# Altium PCB MaiChe.PcbDoc
Units mm, origin at the board's own origin, x right, y up, seen from the top; angles counter-clockwise.
Board outline 152.4 x 101.6 mm, 2 copper layers (Top Layer, Bottom Layer); 32 components, 34 nets, 120 pads, 0 vias.
Unrouted connection lines stored in the file: 17.
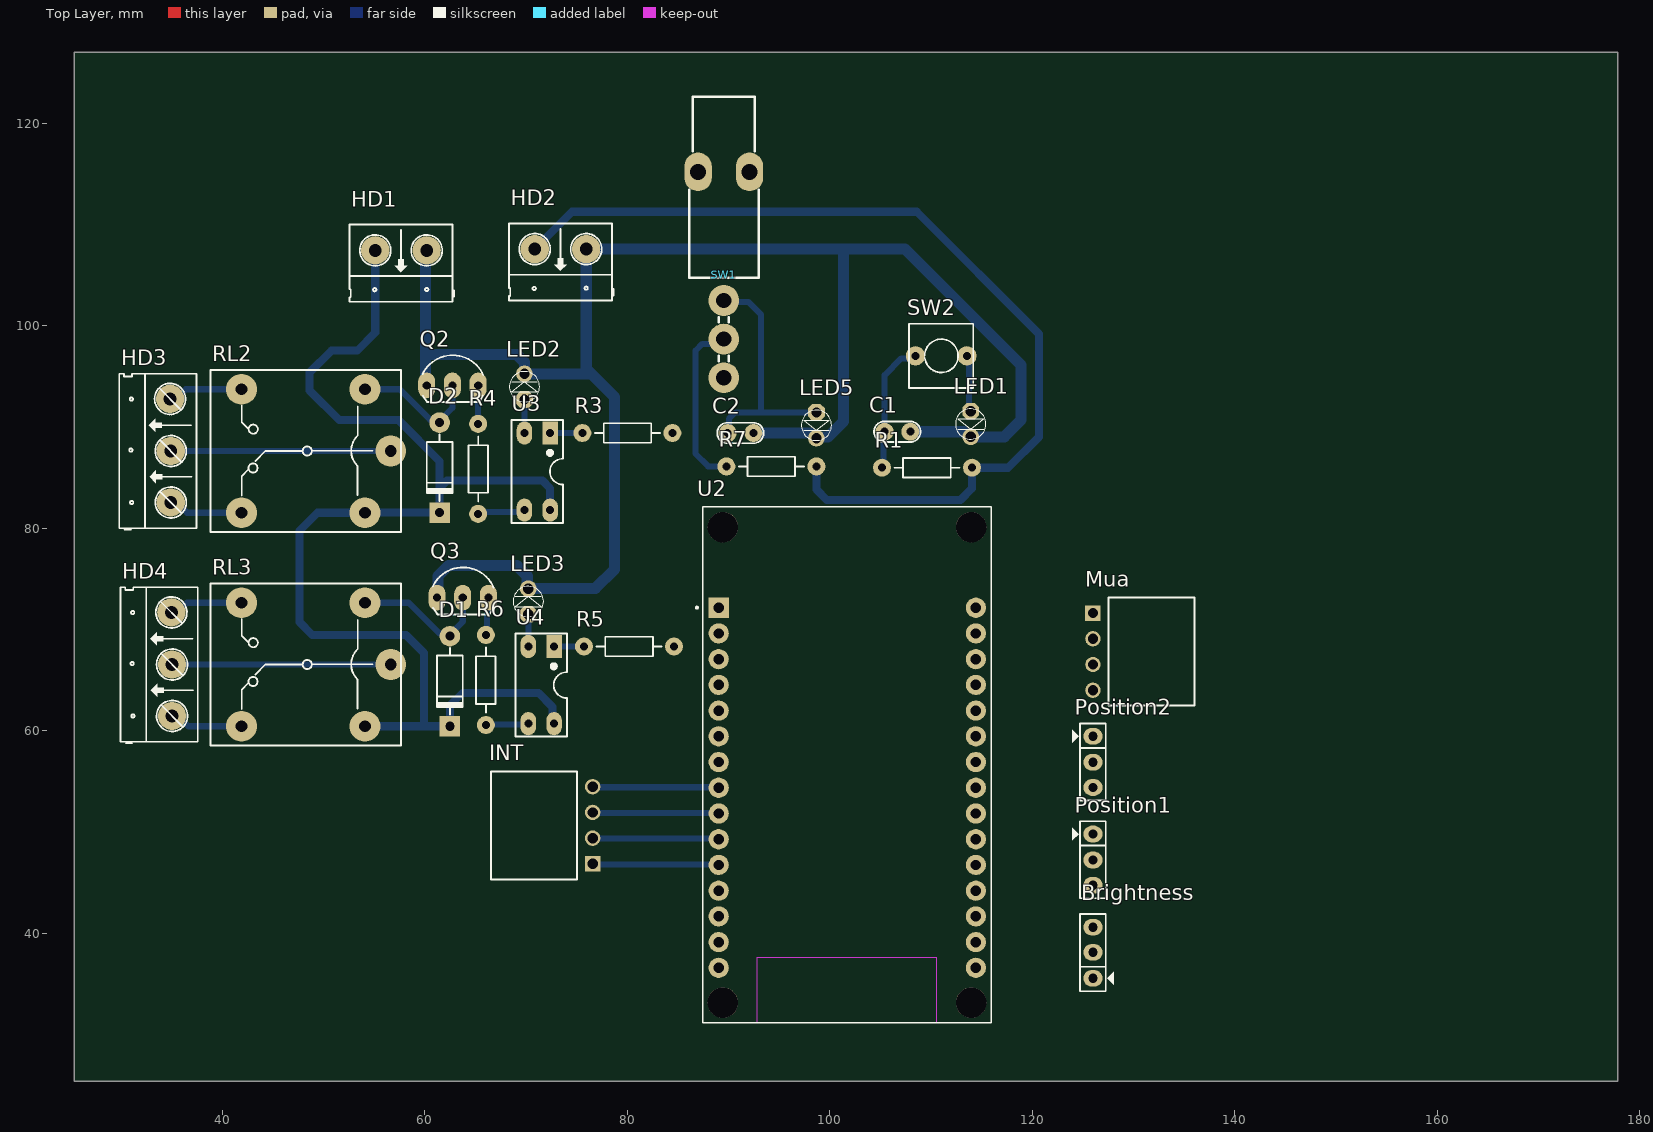
[diagram p0: Top Layer view]
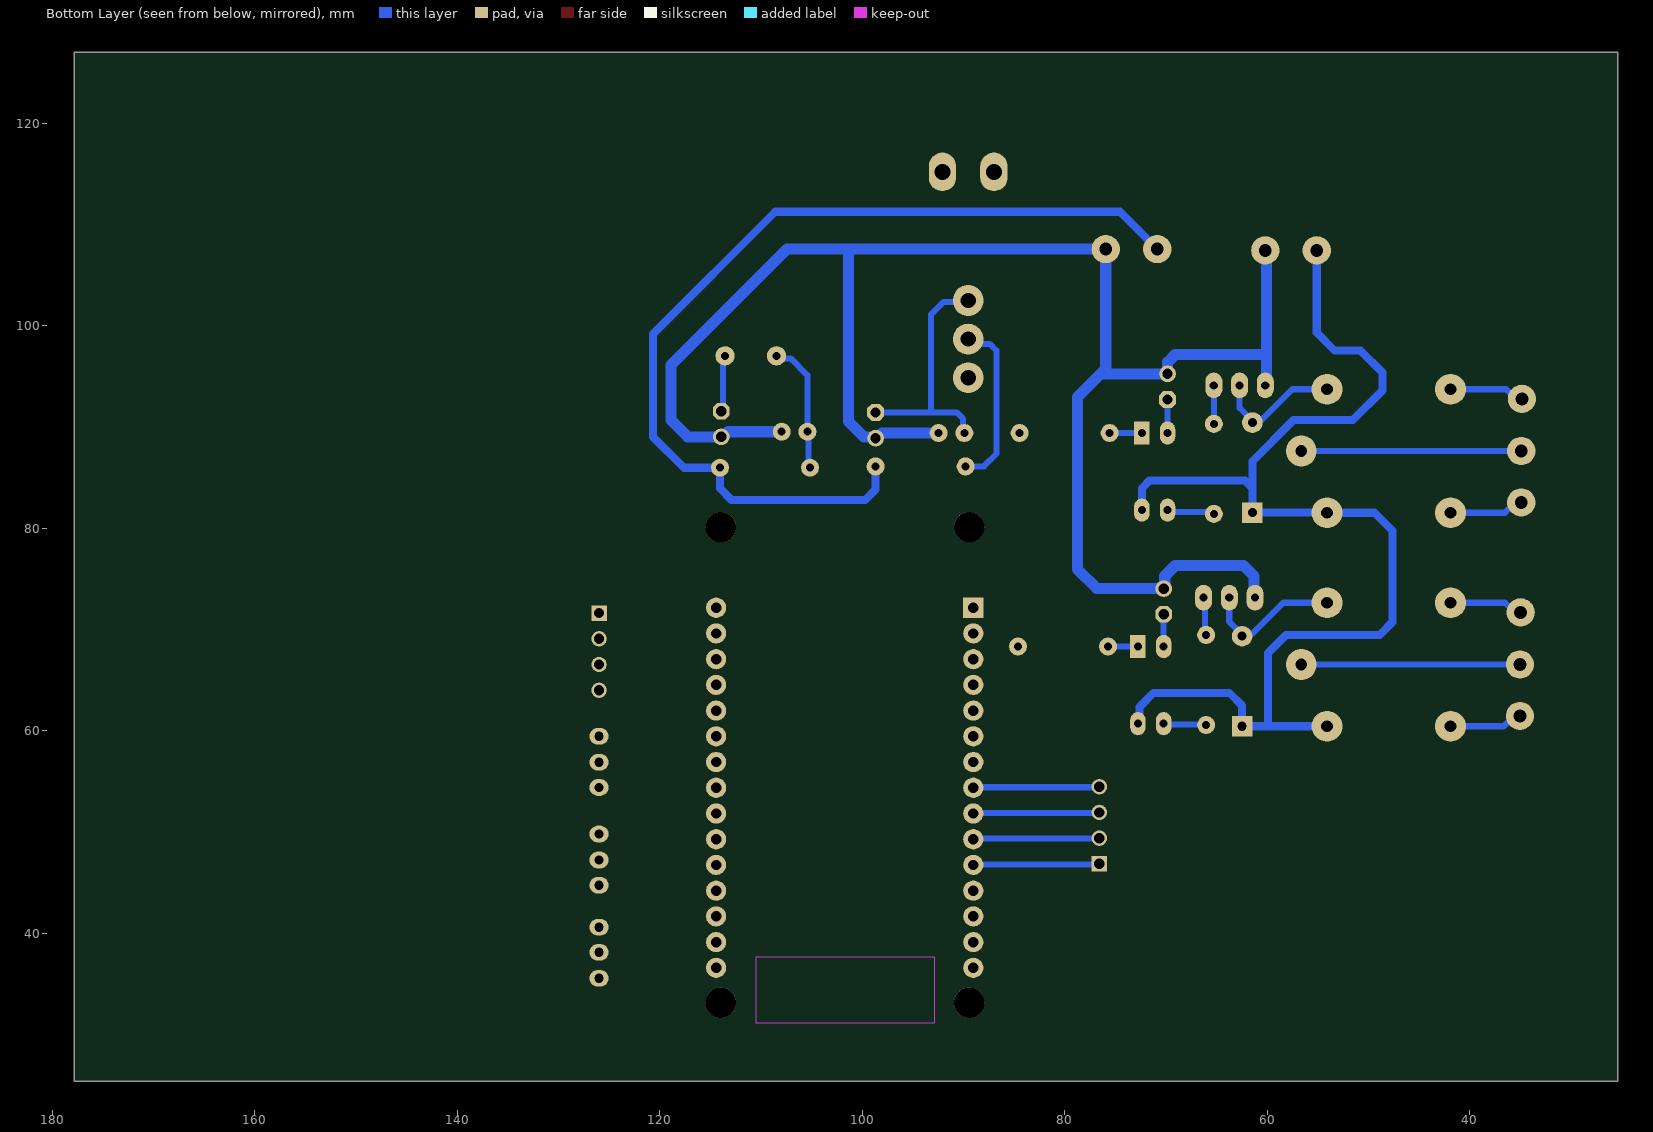
[diagram p1: Bottom Layer view, seen from below]
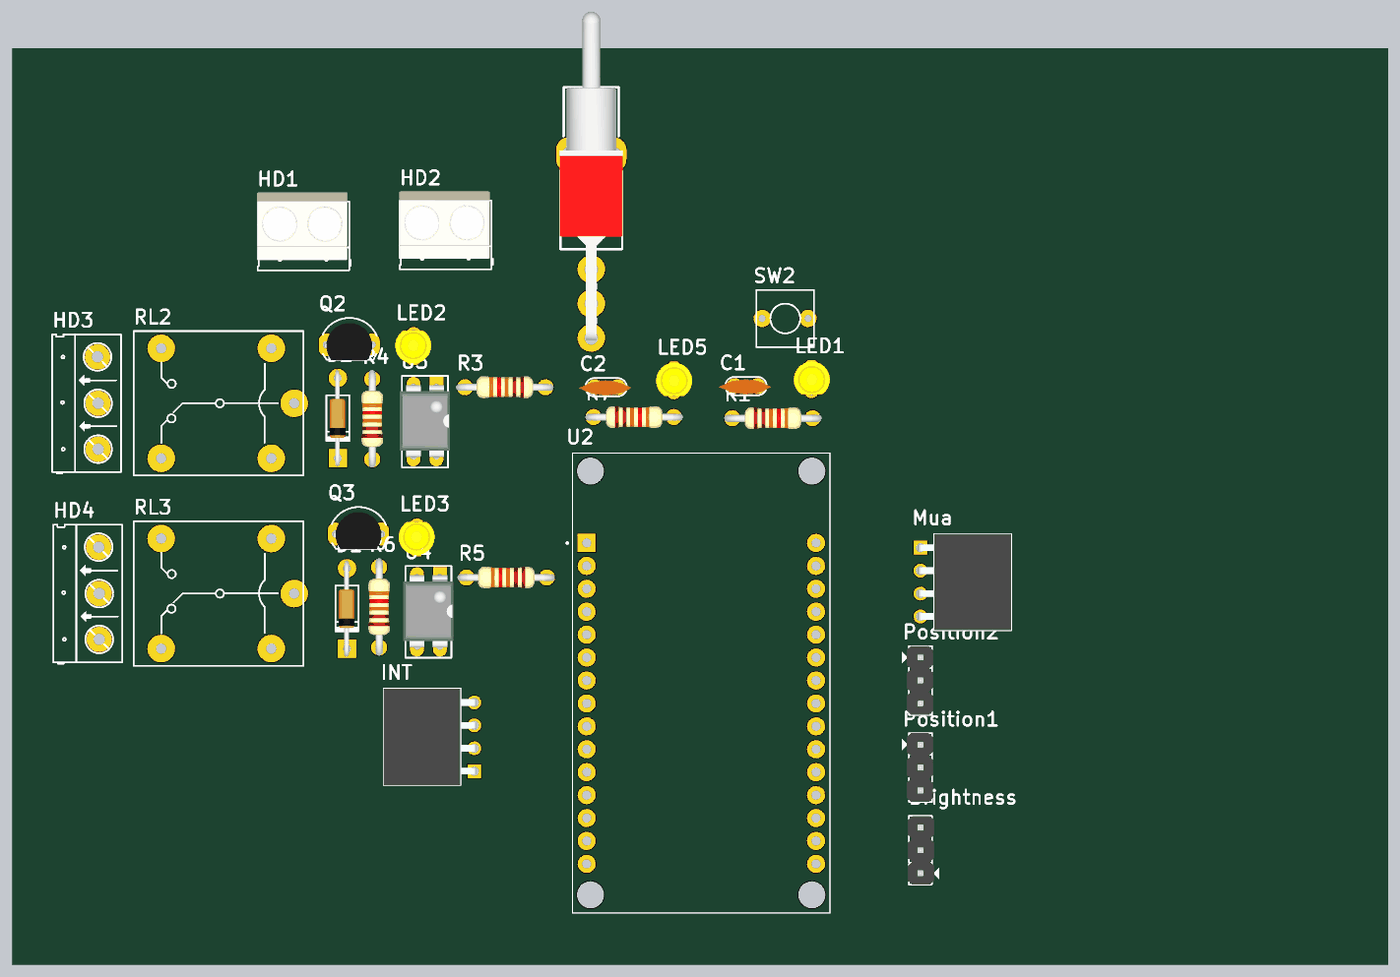
[diagram p2: 3D render of the assembled board from above, using the file's embedded part models]

## Layer stack, top to bottom
Top Solder: solder mask 0.0102, Solder Resist, Dk 3.5
Top Layer: signal copper 0.0356
Dielectric 1: dielectric 0.32, FR-4, Dk 4.8
Bottom Layer: signal copper 0.0356
Bottom Solder: solder mask 0.0102, Solder Resist, Dk 3.5

## Board outline
25.4,25.4 177.8,25.4 177.8,127 25.4,127

## Design rules (kind name [scope] priority, off if disabled: settings)
Clearance [All] p1: gap=0.254 ignorepadtopadclearanceinfootprint=FALSE except(0: Arc-Hole Track-Hole SMDPad-Hole THPad-Hole Via-Hole Fill-Hole Poly-Hole Region-Hole Text-Hole)
PolygonConnect [All] p1: connectstyle=Relief reliefconductorwidth=0.254 reliefentries=4 polygonreliefangle="90 Angle" airgapwidth=0.254
RoutingVias [All] p1: holewidth=0.711 width=1.27 viastyle="Through Hole" minholewidth=0.711 minwidth=1.27 maxholewidth=0.711 maxwidth=1.27
SolderMaskExpansion [All] p1: expansion=0.102 istentingtop=FALSE
Width VCC_3_3 [InNet('3.3V')] p1: maxlimit=0.9 minlimit=0.7 preferedwidth=0.8
Width VCC_12 [InNet('+12')] p2: maxlimit=0.9 minlimit=0.7 preferedwidth=0.8
Width VCC_5 [InNet('+5')] p3: maxlimit=0.9 minlimit=0.7 preferedwidth=0.8
Width GND [InNet('GND')] p4: maxlimit=1.2 minlimit=1 preferedwidth=1.1
Width [All] p5: maxlimit=0.7 minlimit=0.5 preferedwidth=0.6
30 further rules are at their usual default settings.

## Components (designator, comment, footprint, x,y, rotation, side; value= is the part's Value field where it differs from the comment)
Brightness "Jumper 3" JP3 125.984,38.1 r90 top value=J3
C1 "100pF" CN1 107.95,89.535 r180 top
C2 "100pF" CN1 92.456,89.408 r180 top
D1 "1N4007" D1A 62.484,69.342 r90 top
D2 "1N4007" D1A 61.468,90.437 r90 top
HD1 "Header 2" HED2 60.198,107.442 r180 top
HD2 "Header 2" HED2 75.946,107.569 r180 top
HD3 "Header 3" HED3 34.925,82.55 r90 top
HD4 "Header 3" HED3 35.052,61.468 r90 top
INT "JP 1x4 2.54" "JP 1x4 CC" 76.581,50.673 r90 top
LED1 "LED" LED-3MM-YELLOW 113.919,91.567 r270 top value="LED 3 ly Single Colour"
LED2 "LED" LED-3MM-YELLOW 69.85,92.71 r90 top value="LED 3 ly Single Colour"
LED3 "LED" LED-3MM-YELLOW 70.231,71.501 r90 top value="LED 3 ly Single Colour"
LED5 "LED" LED-3MM-YELLOW 98.679,91.44 r270 top value="LED 3 ly Single Colour"
Mua "JP 1x4 2.54" "JP 1x4 CC" 125.984,67.818 r270 top
Position1 "Jumper 3" JP3 125.984,47.269 r270 top value=J3
Position2 "Jumper 3" JP3 125.984,56.921 r270 top value=J3
Q2 "C1815" QTO-92 62.738,94.107 r0 top
Q3 "C1815" QTO-92 63.754,73.152 r0 top
R1 "10K" R1/4W 114.046,85.979 r180 top value="R1/4W - 1K"
R3 "1k" R1/4W 75.565,89.408 r0 top value="R1/4W - 1K"
R4 "510" R1/4W 65.278,90.31 r270 top value="R1/4W - 1K"
R5 "1k" R1/4W 75.724,68.326 r0 top value="R1/4W - 1K"
R6 "510" R1/4W 66.04,69.469 r270 top value="R1/4W - 1K"
R7 "10K" R1/4W 98.679,86.106 r180 top value="R1/4W - 1K"
RL2 "Relay 10A/12V" RL_SPDT_10A 56.642,87.63 r180 top value="Relay SPDT, 10A, 12V"
RL3 "Relay 10A/12V" RL_SPDT_10A 56.642,66.548 r180 top value="Relay SPDT, 10A, 12V"
SW1 "Switch 3x1" SW3x1 89.535,122.631 r180 top value="Switch 4x2"
SW2 "SW" SW2 113.538,97.028 r180 top value="SW chip 2 pin"
U2 "ESP32-DEVKIT-V1" MODULE_ESP32_DEVKIT_V1 101.727,56.642 r0 top
U3 "PC817" DIP4/W0.3 72.39,89.408 r180 top
U4 "PC817" DIP4/W0.3 72.771,68.326 r180 top

## Footprints (in the part's own frame and the unit in brackets; to place one, negate y for a bottom-side part, rotate by r counter-clockwise, add the part's x,y. Pads: shape width x height; smd on the part's side, far side on the other; paste and mask are expansions set on the pad)
CN1 [mil]
  round 70 hole 31: 1(0,0) 2(100,0)
  silkscreen extent -40,-40 141,40, body extent -60,-30 170,37, height 265
D1A [mil] "Diode 1A, W 100mil, L 350mil"
  round 80 hole 35: 1(0,0)
  rect 80x80 hole 35: 2(-350,0)
  silkscreen extent -305,-50 -45,50, body extent -386,-33 34,36, height 84
DIP4/W0.3 [mil] "4 PIN, W 300mil, Pin to pin 100mil"
  rect 60x90 hole 31: 1(0,0)
  oval 60x90 hole 31: 2(100,0) 3(100,300) 4(0,300)
  silkscreen extent -50,-50 150,350, body extent -59,-10 159,305, height 170
HED2 [mil] "Header 2, 2 pin, hight 300mil, Pin to Pin 200, Colour Green"
  round 110 hole 50: 1(0,0) 2(200,0)
  silkscreen extent -106,-100 300,200, body extent -92,-140 302,155, height 394
HED3 [mil] "Header 3, 3 pin, hight 300mil, Pin to Pin 200, Colour Green"
  round 110 hole 50: 1(0,0) 2(200,0) 3(402.62,2.62)
  silkscreen extent -106,-100 500,200
JP3 [mil] "Jumper 3"
  oval 65x75 hole 36: 1(-100,0) 2(1,0) 3(99,0)
  silkscreen extent -150,-81 150,50, body extent -150,-60 150,55, height 355
"JP 1x4 CC" [mm]
  rect 1.52x1.52 hole 1.02: 1(-3.81,0)
  round 1.52 hole 1.02: 2(-1.27,0) 3(1.27,0) 4(3.81,0)
  silkscreen extent -5.33,1.52 5.33,10.03, body extent -5.33,-0.25 5.33,10.05, height 2.51
LED-3MM-YELLOW [mil]
  oct 65x65 hole 40: 1(0,0)
  round 65 hole 40: 2(100,0)
  silkscreen extent -9,-59 109,59, body extent -27,-77 117,80, height 181
MODULE_ESP32_DEVKIT_V1 [mm]
  rect 2x2 hole 1.02: 1(-12.7,15.515)
  round 2 hole 1.02: 2(-12.7,12.975) 3(-12.7,10.435) 4(-12.7,7.895) 5(-12.7,5.355) 6(-12.7,2.815) 7(-12.7,0.275) 8(-12.7,-2.265) 9(-12.7,-4.805) 10(-12.7,-7.345) 11(-12.7,-9.885) 12(-12.7,-12.425) 13(-12.7,-14.965) 14(-12.7,-17.505) 15(-12.7,-20.045) 16(12.7,-20.045) 17(12.7,-17.505) 18(12.7,-14.965) 19(12.7,-12.425) 20(12.7,-9.885) 21(12.7,-7.345) 22(12.7,-4.805) 23(12.7,-2.265) 24(12.7,0.275) 25(12.7,2.815) 26(12.7,5.355) 27(12.7,7.895) 28(12.7,10.435) 29(12.7,12.975) 30(12.7,15.515)
  round 3 hole 3 unplated: ""(-12.28,-23.475) ""(-12.28,23.475) ""(12.23,-23.475) ""(12.23,23.475)
  Keep-Out Layer region: 8.78,-25.475 -8.91,-25.475 -8.91,-18.985 8.78,-18.985
  Keep-Out Layer region: 8.78,-25.475 -8.91,-25.475 -8.91,-18.985 8.78,-18.985
  Keep-Out Layer region: 8.78,-25.475 -8.91,-25.475 -8.91,-18.985 8.78,-18.985
  silkscreen extent -14.95,-25.48 14.23,25.48
QTO-92 [mil] "TO-92"
  oval 66x100 hole 32: 1(-100,0) 2(0,0) 3(100,0)
  silkscreen extent -117,-65 120,118, body extent -109,-66 109,95, height 245
R1/4W [mil] "R 1/4W, 2 Pin, 350mil"
  round 70 hole 31: 1(0,0) 2(350,0)
  silkscreen extent 48,-38 302,38, body extent -40,-47 386,47, height 111
RL_SPDT_10A [mil] "Relay SPDT, 5 pin, 10A,W 650mil, L 800mil, H 800mil"
  round 120 hole 45: 1(0,0) 2(580,240) 3(580,-240) 4(100,-240) 5(100,240)
  silkscreen extent -40,-315 700,315
SW2 [mil] "SW button 2pin, 250x 250 mil"
  round 75 hole 31: 1(0,0) 2(200,0)
  silkscreen extent -25,-125 225,125
SW3x1 [mm]
  round 3.048 hole 1.5: 1(0,20.142) 2(0,23.952) 3(0,27.762)
  oval 2.7x3.81 hole 1.6: S1(2.54,7.442) S2(-2.54,7.442)
  silkscreen extent -3.43,0 3.43,26.11, body extent -3.5,-8.38 3.5,28.01, height 13

## Part data
Brightness Position1 Position2: library part JP3
C1 C2: library part CN1, "Cap np  1pF - 472pF"
D1 D2: library part D1A, "Diode 1A"
HD1 HD2: library part Hed2, "Header 2 (Green)"
HD3 HD4: library part Hed3, "Header 3 (Green)"
INT Mua: library part "JP 1x4 2.54 Cai Cong", "Cắm", Chung_Loai=Cắm, Don_Vi=Con, Ma_Hang=MH001265, Ten_Linh_Kien="Jump Đơn Cái 2.54MM 1x40P Cong"
LED1 LED2 LED3 LED5: "LED Single colour Green and Red"
Q2 Q3: "NPN 600mW, ECB"
R1 R3 R4 R5 R6 R7: library part R1/4W, "Resistor 1/4W"
RL2 RL3: library part "Relay 1", "Relay SPDT,10A - 12VDC 5 Pin"
SW1: library part SW3x1
SW2: library part SW2, "Switch button 2 pin"
U2: "Dual core, Wi-Fi: 2.4 GHz up to 150 Mbits/s,BLE (Bluetooth Low Energy) and legacy Bluetooth, 32 bits, Up to 240 MHz", Package=None, Availability="Not in stock", Check_prices=https://www.snapeda.com/parts/ESP32-DEVKIT-V1/Do+it/view-part/?ref=eda, MF="Do it", MP=ESP32-DEVKIT-V1, Price=None, SnapEDA_Link=https://www.snapeda.com/parts/ESP32-DEVKIT-V1/Do+it/view-part/?ref=snap
U3 U4: "Single Opto"

## Nets (pads, with @x,y where several pads share a name; then routed paths per layer and width w, separated by ;. In a path a pad name is that pad's centre, name@x,y a point inside that pad or via, vN(x,y) a via of type N, cw(c..) or ccw(c..) an arc to the next point about the centre after c; other vN are vias at no path point)
3.3V: U2.1
+5: Brightness.3 HD2.2 Mua.4 Position1.3 Position2.3 R1.1 R7.1 | length 94.9
  Bottom Layer w0.8: HD2.2 74.549,111.252 108.585,111.252 120.65,99.187 120.65,89.027 117.602,85.979 R1.1 114.046,83.947 112.903,82.804 99.695,82.804 98.679,83.82 R7.1
+12: D1.2 D2.2 HD1.2 RL2.5 RL3.5 U3.4 U4.4 | length 120.9
  Bottom Layer w0.8: RL3.5 59.817,60.452 ; HD1.2 55.118,99.314 53.34,97.536 50.8,97.536 48.641,95.377 48.641,93.599 51.562,90.678 57.404,90.678 61.468,86.614 61.468,83.986 ; U3.4 72.39,83.947 71.628,84.709 62.191,84.709 61.468,83.986 ; U4.4@72.771,61.283 U4.4 72.632,60.845 72.632,62.369 71.247,63.754 63.754,63.754 62.484,62.484 D1.2 59.817,60.452 ; 59.817,60.452 59.944,60.579 59.944,67.691 58.166,69.469 48.895,69.469 47.625,70.739 47.625,79.756 49.403,81.534 RL2.5 54.108,81.54 61.462,81.54 D2.2 61.468,83.986
DATA1: Position1.1 U2.24
DATA2: Position2.1 U2.25
DATA_Bright: Brightness.1 U2.20
DATA_Mua: Mua.1 U2.21
GND: Brightness.2 C1.1 C2.1 HD1.1 HD2.1 LED1.2 LED2.2 LED3.2 LED5.2 Mua.3 Position1.2 Position2.2 Q2.1 Q3.1 U2.29 | length 178.6
  Bottom Layer w1.1: HD1.1@59.817,107.569 60.088,107.298 60.088,97.028 ; Q2.1@60.308,94.217 Q2.1 60.088,94.217 60.088,97.028 ; Q3.1 61.324,73.262 61.324,75.294 62.357,76.327 69.088,76.327 70.126,75.289 70.126,74.146 LED3.2 76.835,74.041 78.74,75.946 78.74,92.964 76.454,95.25 ; C2.1 98.022,89.408 98.53,88.9 LED5.2 98.784,89.005 99.8,89.005 101.346,90.551 101.346,107.569 ; C1.1 113.262,89.535 113.77,89.027 LED1.2 117.221,89.027 118.872,90.678 118.872,96.139 107.442,107.569 101.346,107.569 ; 60.088,97.028 60.215,97.155 69.088,97.155 69.85,96.393 LED2.2 76.454,95.25 ; 76.454,95.25 75.946,95.758 HD2.1 101.346,107.569
INT1: INT.4 U2.8 | length 12.5
  Bottom Layer w0.6: INT.4 76.634,54.43 88.974,54.43 U2.8
INT2: INT.3 U2.9 | length 12.5
  Bottom Layer w0.6: INT.3 76.634,51.89 88.974,51.89 U2.9
INT3: INT.2 U2.10 | length 12.5
  Bottom Layer w0.6: INT.2 76.634,49.35 88.974,49.35 U2.10
INT4: INT.1 U2.11 | length 12.5
  Bottom Layer w0.6: INT.1 76.634,46.81 88.974,46.81 U2.11
MODE: R7.2 SW1.2 U2.23 | length 17
  Bottom Layer w0.6: SW1.2 89.067,98.211 87.416,98.211 86.741,97.536 86.741,87.376 88,86.117 89.778,86.117 R7.2
MOTOR1: R3.2 U2.27
MOTOR2: R5.2 U2.28
NetC2_2: C2.2 LED5.1 SW1.1 | length 24.3
  Bottom Layer w0.6: SW1.1 89.673,102.351 91.959,102.351 93.218,101.092 93.218,91.567 93.345,91.44 ; C2.2 90.043,89.535 90.043,90.805 90.678,91.44 93.345,91.44 ; LED5.1 93.345,91.44
NetD1_1: D1.1 Q3.2 RL3.4 | length 14.1
  Bottom Layer w0.6: RL3.4 58.42,72.644 61.448,69.616 62.21,69.616 D1.1 62.484,69.512 63.754,70.782 Q3.2
NetD2_1: D2.1 Q2.2 RL2.4 | length 12.9
  Bottom Layer w0.6: RL2.4 57.531,93.726 60.546,90.711 61.194,90.711 D2.1 61.468,90.606 62.738,91.876 Q2.2
NetHD3_1: HD3.1 RL2.2 | length 7.4
  Bottom Layer w0.6: HD3.1 35.519,82.55 36.535,81.534 RL2.2
NetHD3_2: HD3.2 RL2.1 | length 21.7
  Bottom Layer w0.6: HD3.2 RL2.1
NetHD3_3: HD3.3 RL2.3 | length 7.4
  Bottom Layer w0.6: HD3.3 35.452,92.777 36.402,93.726 RL2.3
NetHD4_1: HD4.1 RL3.2 | length 7.3
  Bottom Layer w0.6: HD4.1 35.646,61.468 36.662,60.452 RL3.2
NetHD4_2: HD4.2 RL3.1 | length 21.6
  Bottom Layer w0.6: HD4.2 RL3.1
NetHD4_3: HD4.3 RL3.3 | length 7.3
  Bottom Layer w0.6: HD4.3 35.579,71.695 36.529,72.644 RL3.3
NetLED1_1: LED1.1 SW2.1 | length 5.6
  Bottom Layer w0.6: SW2.1 113.728,96.837 113.728,91.757 LED1.1
NetLED2_1: LED2.1 U3.2 | length 3.3
  Bottom Layer w0.6: U3.2 LED2.1
NetLED3_1: LED3.1 U4.2 | length 3.2
  Bottom Layer w0.6: U4.2 LED3.1
NetQ2_3: Q2.3 R4.1 | length 3.8
  Bottom Layer w0.6: R4.1 Q2.3
NetQ3_3: Q3.3 R6.1 | length 3.8
  Bottom Layer w0.6: R6.1 66.167,69.596 66.167,73.025 Q3.3
NetR3_1: R3.1 U3.1 | length 3.5
  Bottom Layer w0.6: U3.1 R3.1 R3.1@75.565,89.089
NetR4_2: R4.2 U3.3 | length 4.7
  Bottom Layer w0.6: R4.2 65.462,81.604 69.666,81.604 U3.3
NetR5_1: R5.1 U4.1 | length 3
  Bottom Layer w0.6: U4.1 R5.1
NetR6_2: R6.2 U4.3 | length 4.2
  Bottom Layer w0.6: R6.2 66.103,60.642 70.168,60.642 U4.3
Reset: C1.2 R1.2 SW2.2 U2.22 | length 13.1
  Bottom Layer w0.6: R1.2 105.283,86.106 105.283,89.408 C1.2 105.41,95.123 107.065,96.778 108.208,96.778 SW2.2
pads on no net: Mua.2 SW1.3 SW1.S1 SW1.S2 U2. U2.2 U2.3 U2.4 U2.5 U2.6 U2.7 U2.12 U2.13 U2.14 U2.15 U2.16 U2.17 U2.18 U2.19 U2.26 U2.30